# EAGLE board 04A-015 (EAGLE 6.3)
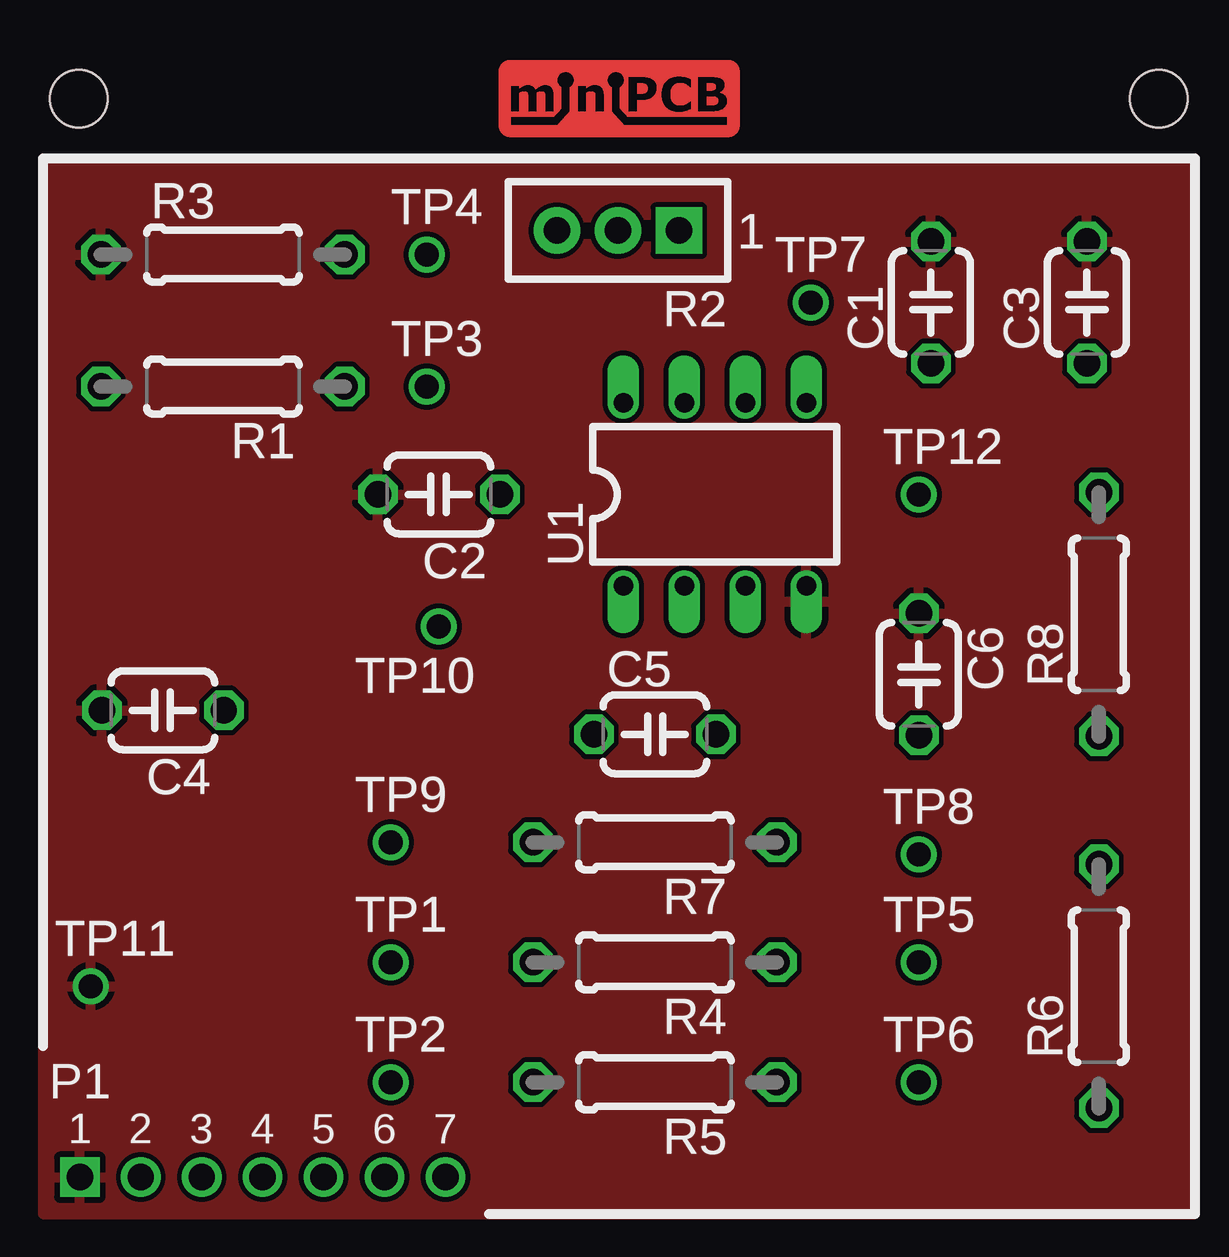
[diagram p0: board, top side]
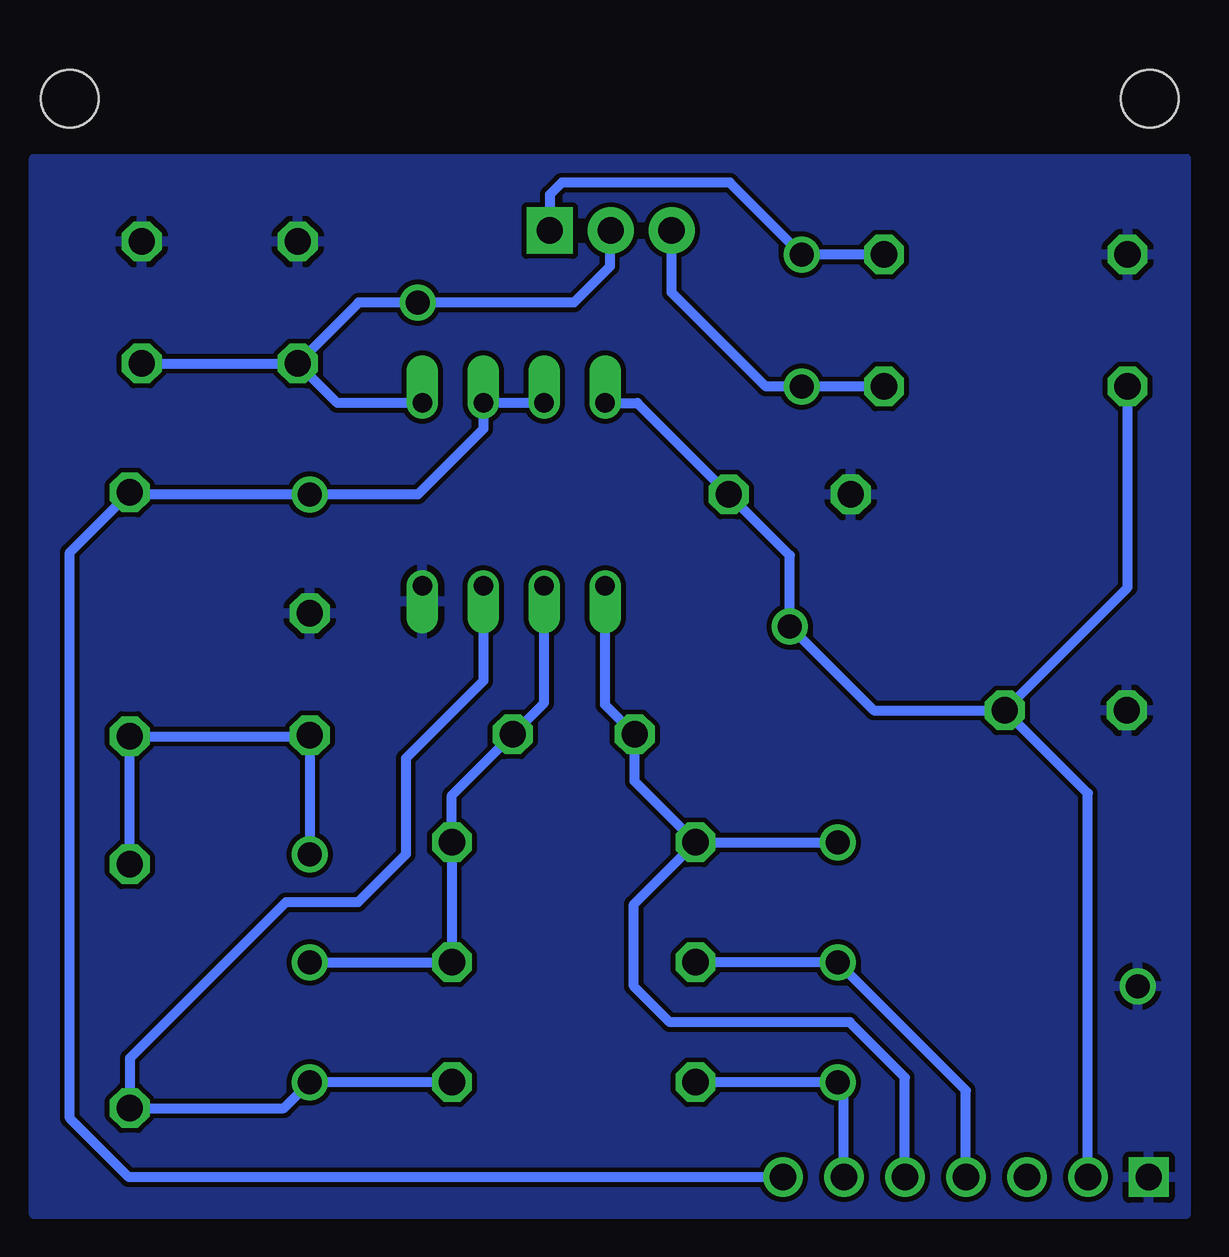
[diagram p1: board, bottom side, seen from below]

No outline drawn. Coordinates in mm, seen from the top.
Copper layers (1*16): Top 0.035mm / dielectric 1.5mm / Bottom 0.035mm
Design rules "minipcb": minimum track width 10mil, minimum drill 24mil, track to track 8mil, track to pad 8mil, pad to pad 8mil, via to via 8mil, smd to smd 8mil, copper to edge 40mil, drill to drill 8mil, minimum pad ring 10mil, minimum via ring 8mil, stop-mask expansion 4mil, vias tented up to drill 20mil, thermal gap 10mil

## Footprints (pad centres in the part's own frame; a part is rotated, then mirrored left to right if it is on the bottom)
C050-024X044 = drill 1.1 octagon: 1 -2.54,0; 2 2.54,0
MINIPCB_7P_50X50 = drill 1.1 square: 1 2.54,2.54 | drill 1.1: 2 5.08,2.54; 3 7.62,2.54; 4 10.16,2.54; 5 12.7,2.54; 6 15.24,2.54; 7 17.78,2.54 | hole 2.4: 47.5,47.5; 2.5,47.5
0207/10 = drill 1.1 octagon: 1 -5.08,0; 2 5.08,0
TRIM_0100 = drill 1.1 pad 1.93 square: 1 0,0 | drill 1.1 pad 1.93: 2 2.54,0; 3 5.08,0
PINS_1_TESTPOINT_KE5000_NOTEXT = drill 1: 1 0,0
DIL08 = drill 0.813 offset: 1 -3.81,-3.81; 2 -1.27,-3.81; 3 1.27,-3.81; 4 3.81,-3.81; 5 3.81,3.81; 6 1.27,3.81; 7 -1.27,3.81; 8 -3.81,3.81

## Placement (x,y rotation side)
C1  [C050-024X044]  38,39 90 top
C2  [C050-024X044]  17.5,31 180 top
C3  [C050-024X044]  44.5,39 90 top
C4  [C050-024X044]  6,22 180 top
C5  [C050-024X044]  26.5,21 0 top
C6  [C050-024X044]  37.5,23.5 270 top
P1-  [MINIPCB_7P_50X50]  0,0 0 top
R1  [0207/10]  8.5,35.5 180 top
R2  [TRIM_0100]  27.5,42 180 top
R3  [0207/10]  8.5,41 0 top
R4  [0207/10]  26.5,11.5 180 top
R5  [0207/10]  26.5,6.5 180 top
R6  [0207/10]  45,10.5 90 top
R7  [0207/10]  26.5,16.5 180 top
R8  [0207/10]  45,26 90 top
TP1  [PINS_1_TESTPOINT_KE5000_NOTEXT]  15.5,11.5 0 top
TP2  [PINS_1_TESTPOINT_KE5000_NOTEXT]  15.5,6.5 0 top
TP3  [PINS_1_TESTPOINT_KE5000_NOTEXT]  17,35.5 0 top
TP4  [PINS_1_TESTPOINT_KE5000_NOTEXT]  17,41 0 top
TP5  [PINS_1_TESTPOINT_KE5000_NOTEXT]  37.5,11.5 0 top
TP6  [PINS_1_TESTPOINT_KE5000_NOTEXT]  37.5,6.5 0 top
TP7  [PINS_1_TESTPOINT_KE5000_NOTEXT]  33,39 0 top
TP8  [PINS_1_TESTPOINT_KE5000_NOTEXT]  37.5,16 0 top
TP9  [PINS_1_TESTPOINT_KE5000_NOTEXT]  15.5,16.5 0 top
TP10  [PINS_1_TESTPOINT_KE5000_NOTEXT]  17.5,25.5 180 top
TP11  [PINS_1_TESTPOINT_KE5000_NOTEXT]  3,10.5 0 top
TP12  [PINS_1_TESTPOINT_KE5000_NOTEXT]  37.5,31 0 top
U1  [DIL08]  29,31 0 top

## Library data of the parts
C1-C6 R1-R8 TP1-TP12 U1 = minipcb
P1- = minipcb; PART_NUMBER: X04A-015-B; REVISION: B

## Nets
GND: C1.2 C2.2 C3.2 C4.2 C6.1 P1-.1 R3.1 TP11.1 U1.4
IN: P1-.4 R4.2 TP1.1
N$1: C1.1 C3.1 R2.2 TP7.1 U1.5
N$2: C6.2 R6.2 R8.1 TP8.1
N$3: R5.1 R6.1 TP6.1 U1.3
N$4: P1-.6 R5.2 TP2.1
NC: P1-.3
OUT: C5.1 P1-.5 R7.2 TP9.1 U1.1
P1.1: R2.1 R3.2 TP4.1
P1.3: R1.1 R2.3 TP3.1
V+: C2.1 C4.1 P1-.2 R1.2 TP10.1 U1.8
VFB: C5.2 R4.1 R7.1 TP5.1 U1.2
VREF: P1-.7 R8.2 TP12.1 U1.6 U1.7

## Tracks (layer width: path | path; a pad name or v marks a point on that pad's centre or on a via)
GND
  pour Top: 1,1 49,1 49,45 1,45
  pour Bottom: 1,1 49,1 49,45 1,45
IN
  Bottom 0.406: R4.2 TP1.1 10.16,6.16 P1-.4
N$1
  Bottom 0.406: R2.2 25,41.96 25,40.5 26.5,39 TP7.1 35.46,39 C1.1 | U1.5 36.35,34.81 C1.1 | C3.1 C1.1
N$2
  Bottom 0.406: R6.2 R8.1 37.54,20.92 C6.2 TP8.1
N$3
  Bottom 0.406: R5.1 TP6.1 38.58,5.42 R6.1 45,7.5 38.5,14 35.5,14 33.5,16 33.5,20 30.27,23.23 U1.3
N$4
  Bottom 0.406: P1-.6 15.24,6.24 TP2.1 R5.2
OUT
  Bottom 0.406: U1.1 25.19,22.23 C5.1 23.96,19.04 R7.2 | R7.2 TP9.1 | P1-.5 12.7,6.7 15,9 22.5,9 24,10.5 24,13.92 R7.2
P1.1
  Bottom 0.406: R3.2 TP4.1 20,44 27,44 27.5,43.5 R2.1
P1.3
  Bottom 0.406: R1.1 TP3.1 18.5,35.5 22.42,39.42 R2.3
V+
  Bottom 0.406: P1-.2 5.08,18.54 C4.1 | U1.8 23.85,34.81 C2.1 17.5,28.46 TP10.1 14,22 C4.1 | C4.1 3.42,27.12 R1.2
VFB
  Bottom 0.406: TP5.1 R4.1 R7.1 31.58,18.46 C5.2 27.73,22.31 U1.2
VREF
  Bottom 0.406: U1.7 U1.6 30.27,33.73 33,31 TP12.1 44.92,31 R8.2 47.5,28.58 47.5,5 45.04,2.54 P1-.7

## Text on the board
_tNames: R3 | TP4 | TP7 | R2 | TP3 | C1 | C3 | R1 | TP12 | C2 | U1 | C6 | TP10 | C5 | R8 | C4 | TP9 | TP8 | R7 | TP1 | TP5 | TP11 | R4 | TP2 | TP6 | R6 | R5